# Altium PCB PCB.PcbDoc
Units mil, origin at the board's own origin, x right, y up, seen from the top; angles counter-clockwise.
Board outline 944.88 x 944.88 mil, 2 copper layers (Top Layer, Bottom Layer); 2 components, 10 nets, 20 pads, 0 vias.
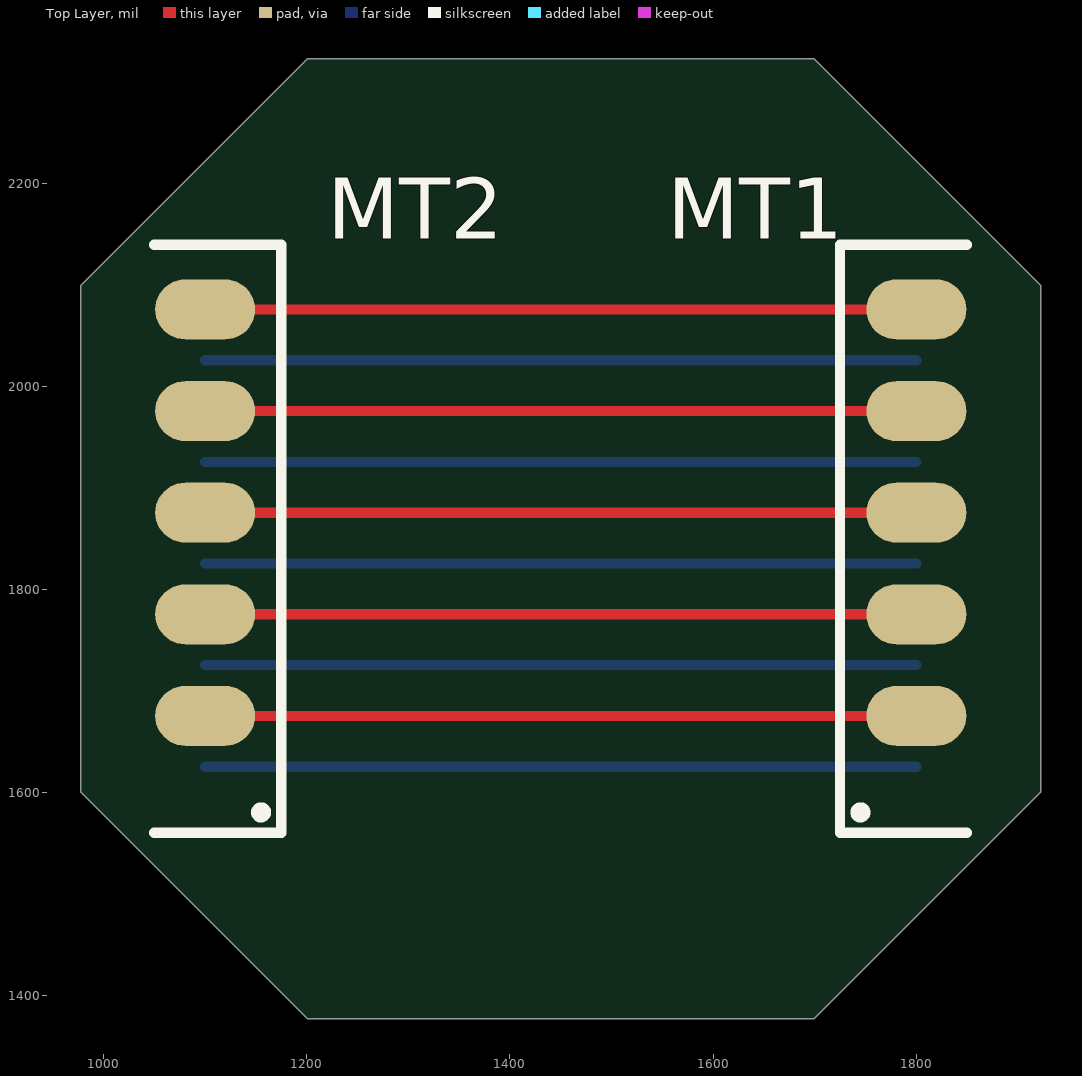
[diagram p0: Top Layer view]
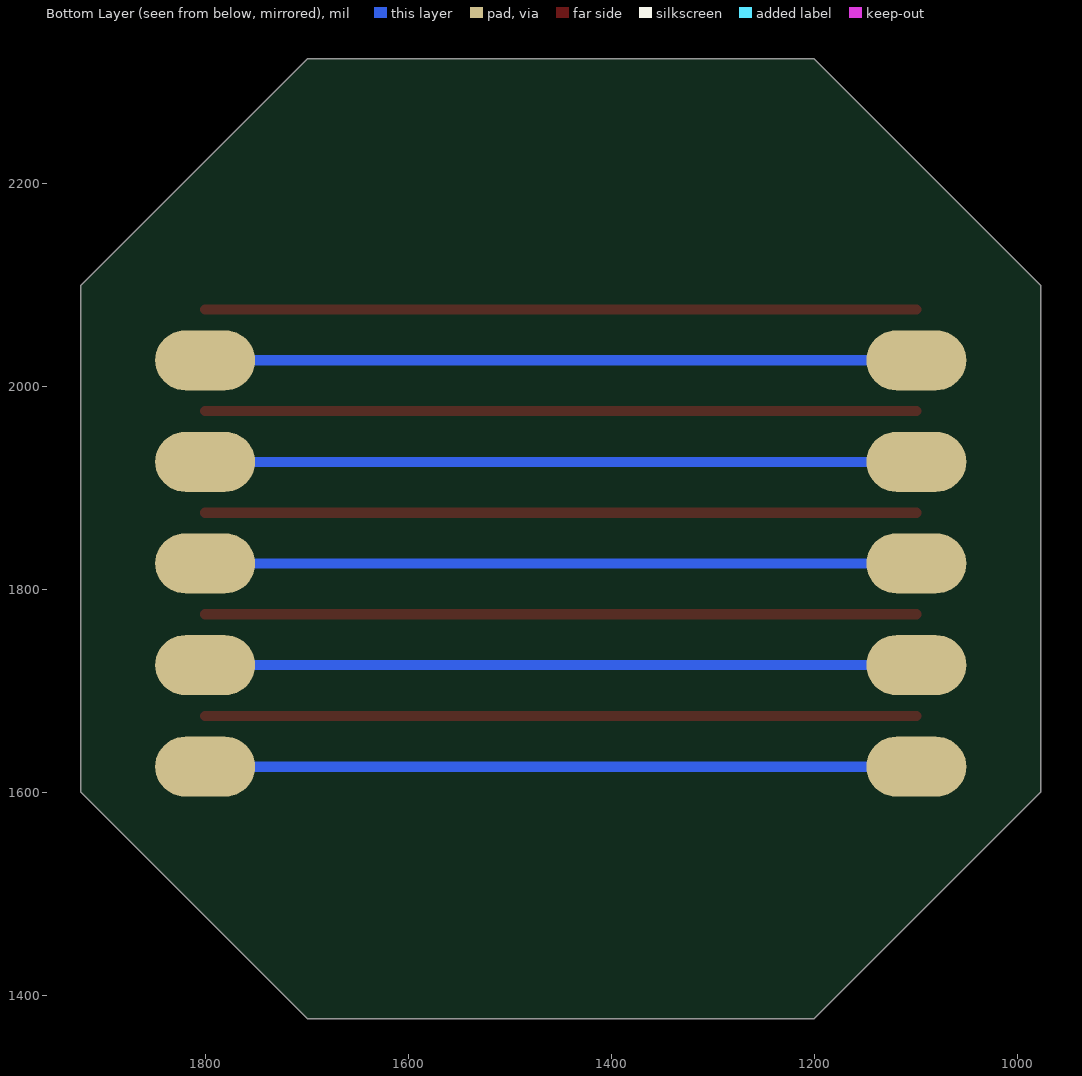
[diagram p1: Bottom Layer view, seen from below]

## Layer stack, top to bottom
Top Solder: solder mask 0.4, Solder Resist, Dk 3.5
Top Layer: signal copper 1.4
Dielectric 1: dielectric 12.6, FR-4, Dk 4.8
Bottom Layer: signal copper 1.4
Bottom Solder: solder mask 0.4, Solder Resist, Dk 3.5

## Board outline
977.56,1600.72 977.56,2099.28 1200.72,2322.44 1699.28,2322.44 1922.44,2099.28 1922.44,1600.72 1699.28,1377.56 1200.72,1377.56

## Design rules (kind name [scope] priority, off if disabled: settings)
Clearance [All] p1: gap=10 ignorepadtopadclearanceinfootprint=FALSE except(0: Arc-Hole Track-Hole SMDPad-Hole THPad-Hole Via-Hole Fill-Hole Poly-Hole Region-Hole Text-Hole)
PolygonConnect [All] p1: connectstyle=Relief reliefconductorwidth=10 reliefentries=4 polygonreliefangle="90 Angle" airgapwidth=10
RoomDefinition Sheet [InComponentClass('Sheet')] p1: confinementstyle=ConfineIn formatcopy=TRUE lockcomponents=FALSE outline 0,0 2000,0 2000,1000 0,1000
RoutingVias [All] p1: holewidth=28 width=50 viastyle="Through Hole" minholewidth=28 minwidth=50 maxholewidth=28 maxwidth=50
SolderMaskExpansion [All] p1: expansion=4 istentingtop=FALSE
Width [All] p1: maxlimit=10 minlimit=10 preferedwidth=10
30 further rules are at their usual default settings.

## Components (designator, comment, footprint, x,y, rotation, side; value= is the part's Value field where it differs from the comment)
MT1 "MT" "Micro-MaTch Famale 1.27mm/SMD" 1800,1625.63 r90 top
MT2 "MT" "Micro-MaTch Famale 1.27mm/SMD" 1100,1625.63 r90 top

## Footprints (in the part's own frame and the unit in brackets; to place one, negate y for a bottom-side part, rotate by r counter-clockwise, add the part's x,y. Pads: shape width x height; smd on the part's side, far side on the other; paste and mask are expansions set on the pad)
"Micro-MaTch Famale 1.27mm/SMD" [mm]
  round 0 / inner oval 1.5x2.5 / far side oval 1.5x2.5 all layers, no hole mask+0.2: 1(0,0) 3(2.54,0) 5(5.08,0) 7(7.62,0) 9(10.16,0)
  oval 1.5x2.5 / inner oval 1.5x2.5 / far side round 0 all layers, no hole mask+0.2: 2(1.27,0) 4(3.81,0) 6(6.35,0) 8(8.89,0) 10(11.43,0)
  silkscreen extent -1.65,-1.27 13.05,1.91, body extent -1.47,-6.6 13.16,0.55, height 2.6

## Part data
MT1 MT2: library part "Micro-MaTch Famale 1.27mm", "Micro-MaTch Famale 1.27mm T/Hole"

## Nets (pads, with @x,y where several pads share a name; then routed paths per layer and width w, separated by ;. In a path a pad name is that pad's centre, name@x,y a point inside that pad or via, vN(x,y) a via of type N, cw(c..) or ccw(c..) an arc to the next point about the centre after c; other vN are vias at no path point)
NetMT1_1: MT1.1 MT2.1 | length 700
  Bottom Layer w10: MT2.1 MT1.1
NetMT1_2: MT1.2 MT2.2 | length 700
  Top Layer w10: MT2.2 MT1.2
NetMT1_3: MT1.3 MT2.3 | length 700
  Bottom Layer w10: MT2.3 MT1.3
NetMT1_4: MT1.4 MT2.4 | length 700
  Top Layer w10: MT2.4 MT1.4
NetMT1_5: MT1.5 MT2.5 | length 700
  Bottom Layer w10: MT2.5 MT1.5
NetMT1_6: MT1.6 MT2.6 | length 700
  Top Layer w10: MT2.6 MT1.6
NetMT1_7: MT1.7 MT2.7 | length 700
  Bottom Layer w10: MT2.7 MT1.7
NetMT1_8: MT1.8 MT2.8 | length 700
  Top Layer w10: MT2.8 MT1.8
NetMT1_9: MT1.9 MT2.9 | length 700
  Bottom Layer w10: MT2.9 MT1.9
NetMT1_10: MT1.10 MT2.10 | length 700
  Top Layer w10: MT2.10 MT1.10

## Silkscreen, mask and mechanical layers (free items; w line width, h text height)
Autocad:
  lines w0.5: 1450,1850 2119.29,1850 ; 780.71,1515.35 938.19,1515.35 938.19,2184.65 780.71,2184.65 780.71,1515.35 ; 938.19,1584.41 1184.41,1338.19 1715.59,1338.19 1961.81,1584.41 1961.81,2115.59 1715.59,2361.81 1184.41,2361.81 938.19,2115.59 938.19,1584.41 ; 977.56,1600.72 1200.72,1377.56 1699.28,1377.56 1922.44,1600.72 1922.44,2099.28 1699.28,2322.44 1200.72,2322.44 977.56,2099.28 977.56,1600.72 ; 1961.81,1515.35 2119.29,1515.35 2119.29,2184.65 1961.81,2184.65 1961.81,1515.35